# EAGLE board WejsciaAnalogowe5 (EAGLE 7.6.0)

Size 73.58 x 63.39 mm. Coordinates in mm from the lower left corner, seen from the top.
Outline: 0,0 56.82,0 56.82,53.33 0,53.33 0,0
Copper layers (1*16): Top 0.035mm / dielectric 1.5mm / Bottom 0.035mm
Design rules "default": minimum track width 10mil, minimum drill 24mil, track to track 8mil, track to pad 8mil, pad to pad 8mil, via to via 8mil, smd to smd 8mil, copper to edge 40mil, drill to drill 8mil, minimum pad ring 10mil, minimum via ring 8mil, stop-mask expansion 4mil, vias tented up to drill 0mil, thermal gap 10mil

## Footprints (pad centres in the part's own frame; a part is rotated, then mirrored left to right if it is on the bottom)
LED5MM = drill 0.813 octagon: A -1.27,0; K 1.27,0
B25V = drill 0.813 long: A 2.54,0.635; E -2.54,0.635; S 0,0.635
0207/10 = drill 0.813 octagon: 1 -5.08,0; 2 5.08,0
ARDUINO_UNO = drill 1.016 pad 1.88: 0 63.5,50.8; 1 60.96,50.8; 2 58.42,50.8; 3 55.88,50.8; 3.3V 35.56,2.54; 4 53.34,50.8; 5 50.8,50.8; 5V 38.1,2.54; 6 48.26,50.8; 7 45.72,50.8; 8 41.656,50.8; 9 39.116,50.8; 10 36.576,50.8; 11 34.036,50.8; 12 31.496,50.8; 13 28.956,50.8; A0 50.8,2.54; A1 53.34,2.54; A2 55.88,2.54; A3 58.42,2.54; A4 60.96,2.54; A5 63.5,2.54; AREF 23.876,50.8; GND 26.416,50.8; GND. 43.18,2.54; GND.. 40.64,2.54; I/OREF 30.48,2.54; N/C 27.94,2.54; RESET 33.02,2.54; SCL 18.796,50.8; SDA 21.336,50.8; VIN 45.72,2.54 | hole 3.2: 66.04,7.62; 66.04,35.56; 15.24,50.8; 13.97,2.54

## Placement (x,y rotation side)
DGreen1  [LED5MM]  5,73.58 0 top  (outside the outline)
DGreen2  [LED5MM]  5,98.98 0 top  (outside the outline)
DRed1  [LED5MM]  5,48.18 0 top
DRed2  [LED5MM]  5,60.88 0 top
DYellow  [LED5MM]  5,86.28 0 top  (outside the outline)
RpotPotentiometer  250k‎Ω  [B25V]  5,22.78 0 top
RResistor1  100k‎Ω  [0207/10]  5,35.48 0 top
RResistor2  100k‎Ω  [0207/10]  5,111.68 0 top  (outside the outline)
RResistor3  100k‎Ω  [0207/10]  5,137.08 0 top  (outside the outline)
RResistor4  100k‎Ω  [0207/10]  5,124.38 0 top  (outside the outline)
RResistor5  100k‎Ω  [0207/10]  5,149.78 0 top  (outside the outline)
UArduino  [ARDUINO_UNO]  5,10.08 0 top

## Library data of the parts
DGreen1 DGreen2 DRed1 DRed2 DYellow RpotPotentiometer RResistor1-RResistor5 UArduino = AUTODESK_CIRCUITS_BREADBOARD

## Nets
N$1: RpotPotentiometer.S UArduino.A5
N$2: RResistor1.1 UArduino.8
N$3: RResistor2.1 UArduino.9
N$4: RResistor4.1 UArduino.11
N$5: RResistor3.1 UArduino.10
N$6: RResistor5.1 UArduino.12
N$7: DYellow.A RResistor3.2
N$8: DGreen1.A RResistor4.2
N$9: DGreen2.A RResistor5.2
N$10: DRed1.A RResistor1.2
N$11: DRed2.A RResistor2.2
N$12: DGreen1.K DGreen2.K DRed1.K DRed2.K DYellow.K RpotPotentiometer.A UArduino.GND..
N$13: RpotPotentiometer.E UArduino.5V

## Tracks (layer width: path | path; a pad name or v marks a point on that pad's centre or on a via)
N$1  (1 unrouted)
N$2  (1 unrouted)
N$3  (1 unrouted)
N$4  (1 unrouted)
N$5  (1 unrouted)
N$6  (1 unrouted)
N$7  (1 unrouted)
N$8  (1 unrouted)
N$9  (1 unrouted)
N$10  (1 unrouted)
N$11  (1 unrouted)
N$12  (6 unrouted)
N$13  (1 unrouted)